# EAGLE board lighting (EAGLE 9.7.0)
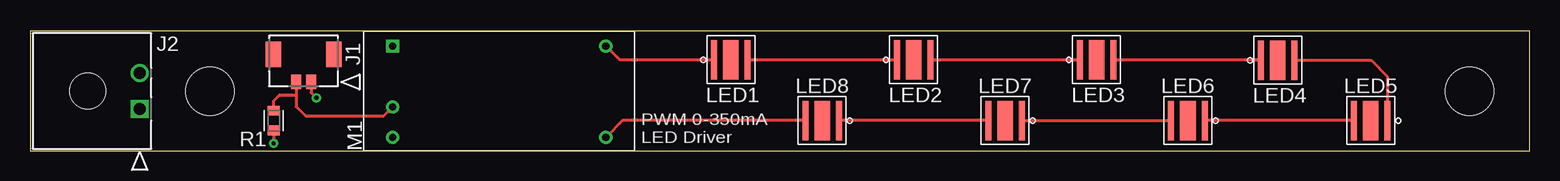
[diagram p0: board, top side]
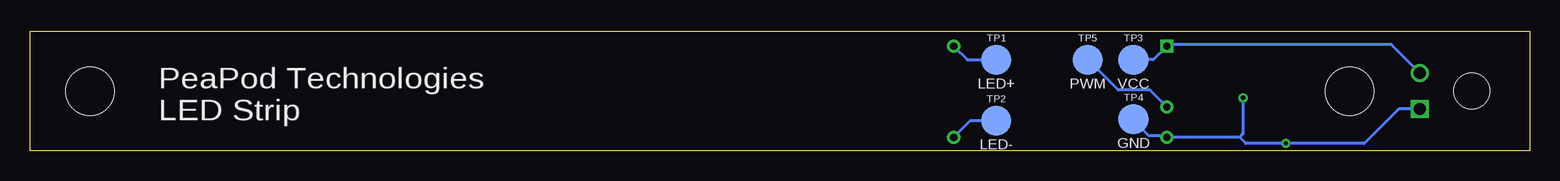
[diagram p1: board, bottom side, seen from below]

Size 125 x 10 mm. Coordinates in mm from the lower left corner, seen from the top.
Outline: 0,0 125,0 125,10 0,10 0,0
Copper layers (1*16): Top 0.035mm / dielectric 1.5mm / Bottom 0.035mm
Design rules "Fusion Electronics Design Rules": minimum track width 6mil, minimum drill 0.35mm, track to track 6mil, track to pad 6mil, pad to pad 6mil, via to via 6mil, smd to smd 6mil, copper to edge 10mil, drill to drill 6mil, minimum pad ring 10mil, minimum via ring 8mil, stop-mask expansion 4mil, vias tented up to drill 0mil, thermal gap 10mil
Holes 4 mm at 120,5 15,5

## Footprints (pad centres in the part's own frame; a part is rotated, then mirrored left to right if it is on the bottom)
2PIN = smd 0.8 x 1.2: 1 0,0; 2 -1.25,0 | smd 1.3 x 2.15: 3 1.9,2.295; 4 -3.15,2.295
2PIN' = drill 1.02 pad 1.52 square: 1 0,0 | drill 1.02 pad 1.52: 2 -3,0 | hole 2.997: -1.499,-4.318
XLAMP_XP-G3 = smd 1.3 x 3.3: NC 0,0 | smd 0.5 x 3.3: P$1 -1.4,0; P$2 1.4,0
LDD-L = drill 0.6 square: +VIN 7.62,0 | drill 0.6: +VOUT 7.62,-17.78; -VIN 0,0; -VOUT 0,-17.78; DIM 2.54,0
RESC1608X60 = smd 0.799 x 0.974: 1 -0.815,0; 2 0.815,0
TP_CIRCLE_2.5MM = smd 2.5 x 2.5: P$1 0,0

## Placement (x,y rotation side)
J1  PWM  [2PIN]  23.44,5.77 0 top
J2  48V  [2PIN']  9.14,3.52 270 top
LED1  XLAMP_XP-G3_ROYAL  [XLAMP_XP-G3]  58.42,7.62 0 top
LED2  XLAMP_XP-G3_ROYAL  [XLAMP_XP-G3]  73.66,7.62 0 top
LED3  XLAMP_XP-G3_ROYAL  [XLAMP_XP-G3]  88.9,7.62 0 top
LED4  XLAMP_XP-G3_ROYAL  [XLAMP_XP-G3]  104.01,7.59 0 top
LED5  XLAMP_XP-G3_ROYAL  [XLAMP_XP-G3]  111.76,2.54 180 top
LED6  XLAMP_XP-G3_ROYAL  [XLAMP_XP-G3]  96.52,2.54 180 top
LED7  XLAMP_XP-G3_ROYAL  [XLAMP_XP-G3]  81.28,2.54 180 top
LED8  XLAMP_XP-G3_ROYAL  [XLAMP_XP-G3]  66.04,2.54 180 top
M1  LDD-350L  [LDD-L]  30.23,1.14 90 top
R1  10k  [RESC1608X60]  20.32,2.54 270 top
TP1  LED+  [TP_CIRCLE_2.5MM]  44.45,7.62 0 bottom
TP2  LED-  [TP_CIRCLE_2.5MM]  44.45,2.54 0 bottom
TP3  VCC  [TP_CIRCLE_2.5MM]  33.02,7.62 0 bottom
TP4  GND  [TP_CIRCLE_2.5MM]  33.02,2.65 0 bottom
TP5  PWM  [TP_CIRCLE_2.5MM]  36.83,7.62 0 bottom

## Library data of the parts
J1 = Molex Micro-Lock PLUS
J2 = Molex Micro-Fit; COPYRIGHT: Copyright (C) 2022 Ultra Librarian. All rights reserved.; MANUFACTURER_PART_NUMBER: 436500201; MFR_NAME: Molex Connector Corporation
LED1-LED8 = XLAMP XP-G3 Royal Blue
M1 = MEAN WELL LDD-L
R1 = Resistor; CATEGORY: Resistor; SUB-CATEGORY: Fixed
TP1-TP5 = Test Point

## Nets
+48V: J2.2 M1.+VIN TP3.P$1
GND: J1.1 J2.1 M1.-VIN R1.2 TP4.P$1
N$1: LED1.P$1 M1.+VOUT TP1.P$1
N$2: LED1.P$2 LED2.P$1
N$3: LED2.P$2 LED3.P$1
N$4: LED3.P$2 LED4.P$1
N$5: LED4.P$2 LED5.P$1
N$6: LED5.P$2 LED6.P$1
N$7: LED6.P$2 LED7.P$1
N$8: LED7.P$2 LED8.P$1
N$9: LED8.P$2 M1.-VOUT TP2.P$1
PWM: J1.2 M1.DIM R1.1 TP5.P$1

## Tracks (layer width: path | path; a pad name or v marks a point on that pad's centre or on a via)
+48V
  Bottom 0.254: TP3.P$1 31.37,7.62 30.29,8.7 M1.+VIN 30.1,8.89 11.51,8.89 J2.2
GND  (via drill 0.35)
  Top 0.254: J1.1 23.44,4.88 v23.88,4.45 | R1.2 v20.32,0.64
  Bottom 0.254: 24.16,1.14 M1.-VIN 30.36,1.27 31.75,1.27 33.02,2.54 TP4.P$1 | v23.88,4.45 23.88,1.43 24.16,1.14 | J2.1 10.89,3.52 13.78,0.64 v20.32,0.64 23.66,0.64 24.16,1.14
N$1
  Top 0.254: M1.+VOUT 49.15,7.62 LED1.P$1
  Bottom 0.254: M1.+VOUT 46.87,7.62 TP1.P$1
N$2
  Top 0.254: LED1.P$2 LED2.P$1
N$3
  Top 0.254: LED2.P$2 LED3.P$1
N$4
  Top 0.254: LED4.P$1 90.33,7.59 LED3.P$2
N$5
  Top 0.254: LED4.P$2 111.79,7.59 113.16,6.22 LED5.P$1
N$6
  Top 0.254: LED5.P$2 LED6.P$1
N$7
  Top 0.254: LED7.P$1 LED6.P$2
N$8
  Top 0.254: LED7.P$2 LED8.P$1
N$9
  Top 0.254: LED8.P$2 49.41,2.54 M1.-VOUT
  Bottom 0.254: M1.-VOUT 46.61,2.54 TP2.P$1
PWM
  Top 0.254: J1.2 22.19,4.7 | 22.19,4.7 22.19,3.72 22.99,2.92 29.46,2.92 M1.DIM | R1.1 20.32,4.19 20.83,4.7 22.19,4.7
  Bottom 0.254: M1.DIM 31.63,5.08 34.29,5.08 TP5.P$1

## Text on the board
bPlace: PeaPod Technologies / LED Strip
tNames: PWM 0-350mA / LED Driver